# Altium PCB PCB.PcbDoc
Units mm, origin at the board's own origin, x right, y up, seen from the top; angles counter-clockwise.
Board outline 32 x 34 mm, 2 copper layers (Top Layer, Bottom Layer); 35 components, 21 nets, 187 pads, 54 vias.
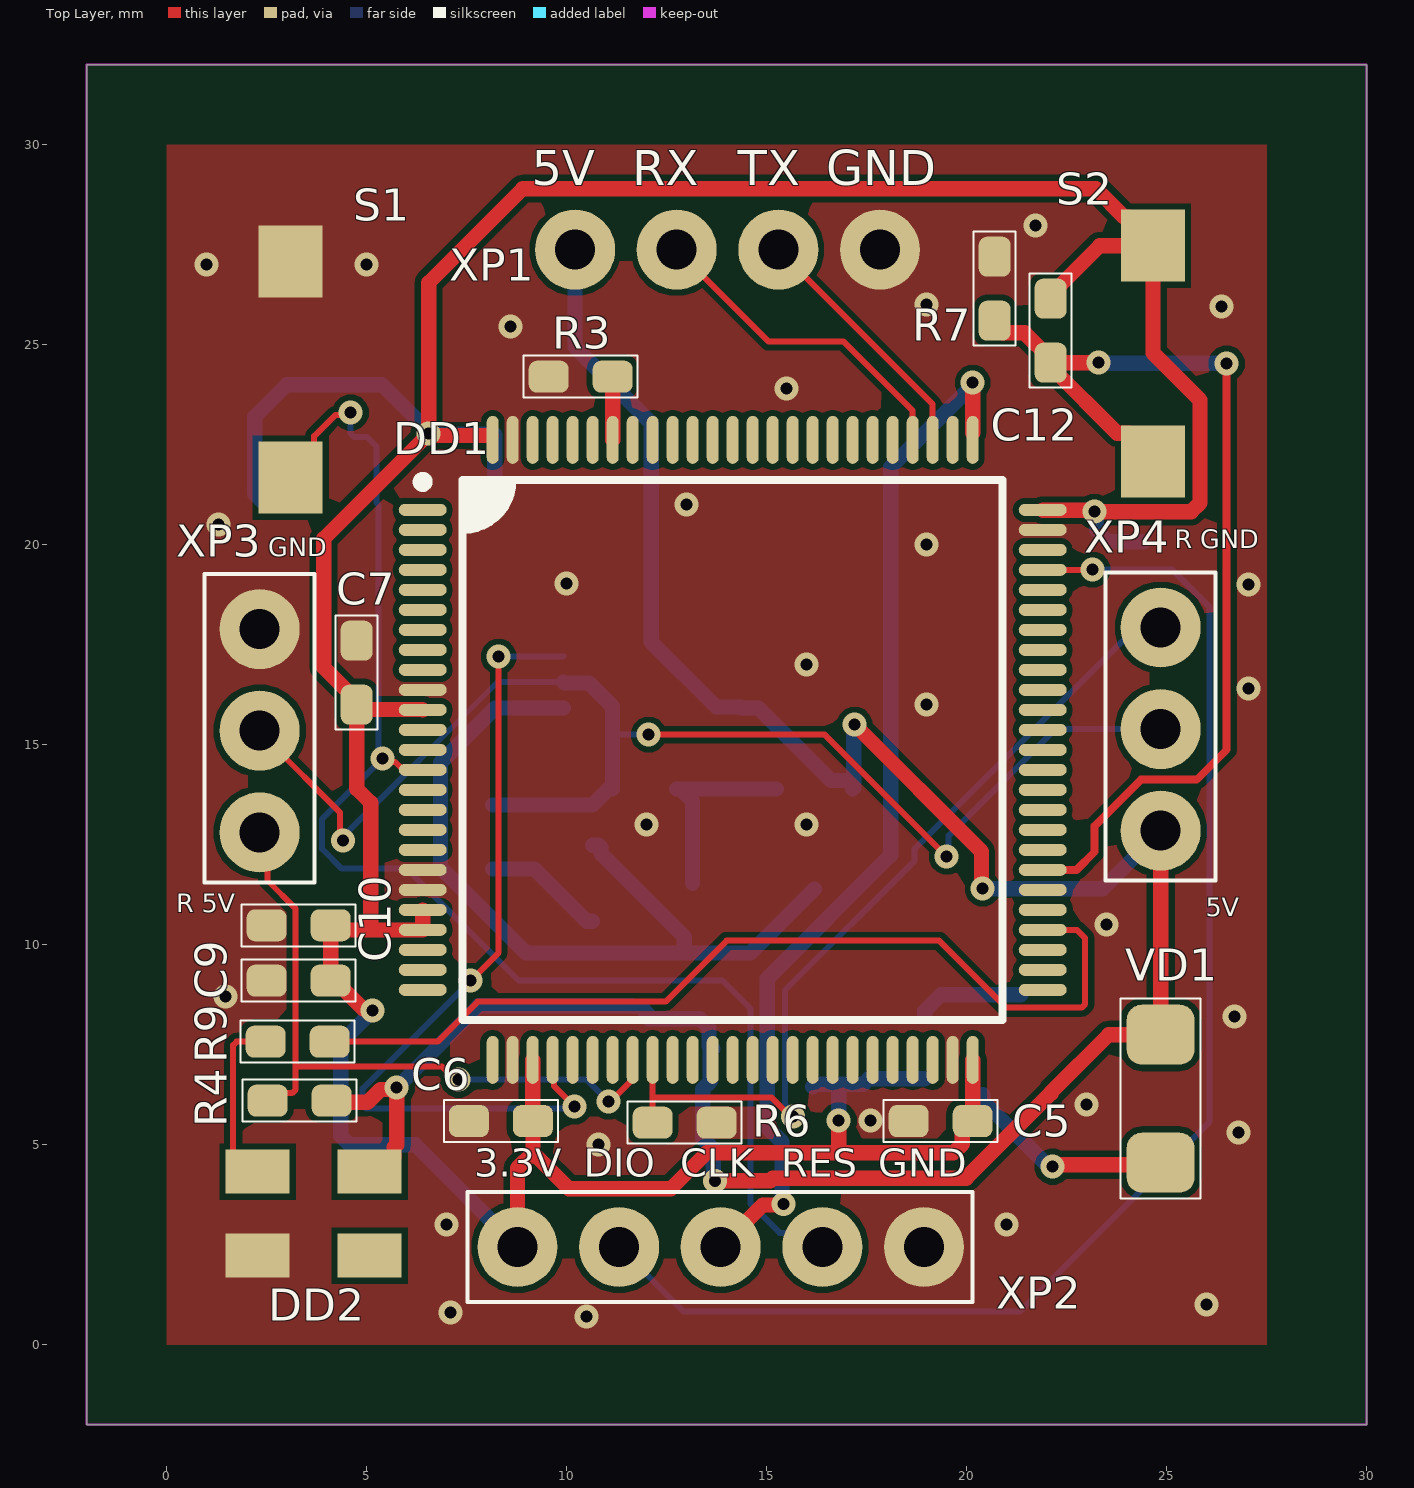
[diagram p0: Top Layer view]
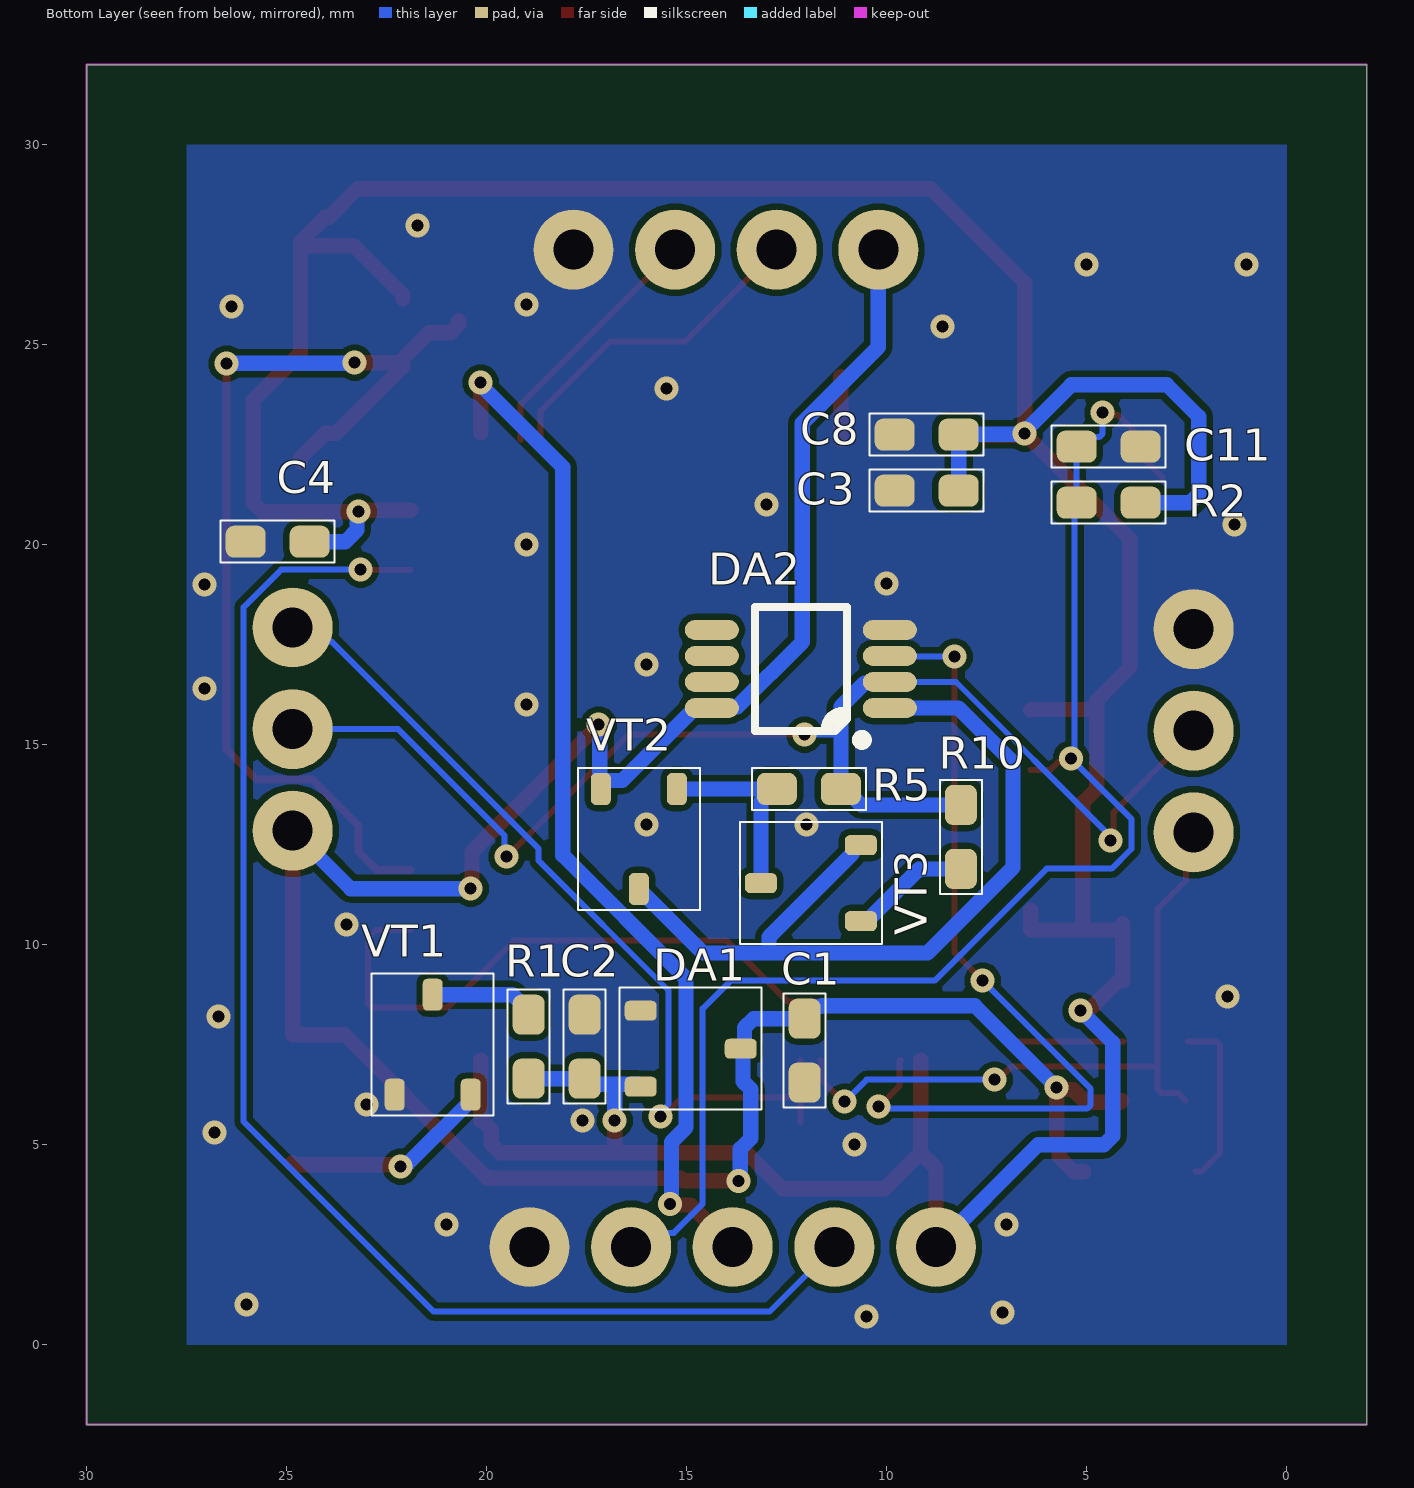
[diagram p1: Bottom Layer view, seen from below]
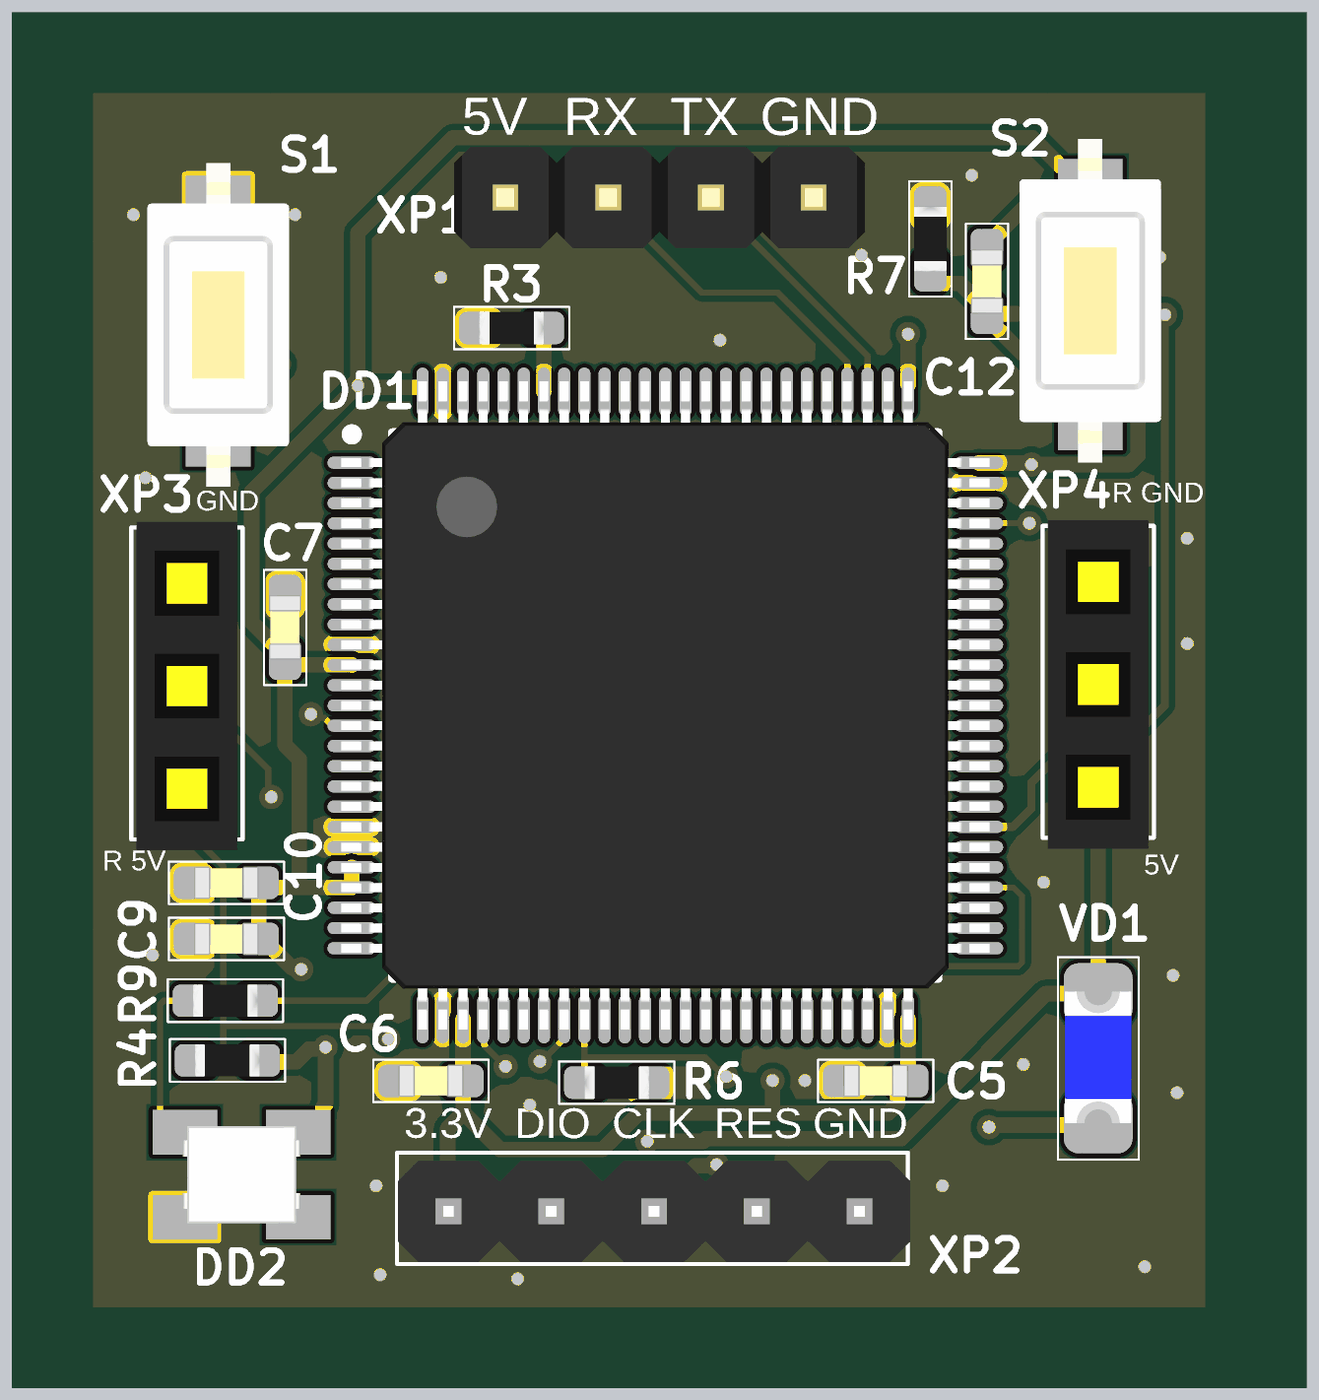
[diagram p2: 3D render of the assembled board from above, using the file's embedded part models]
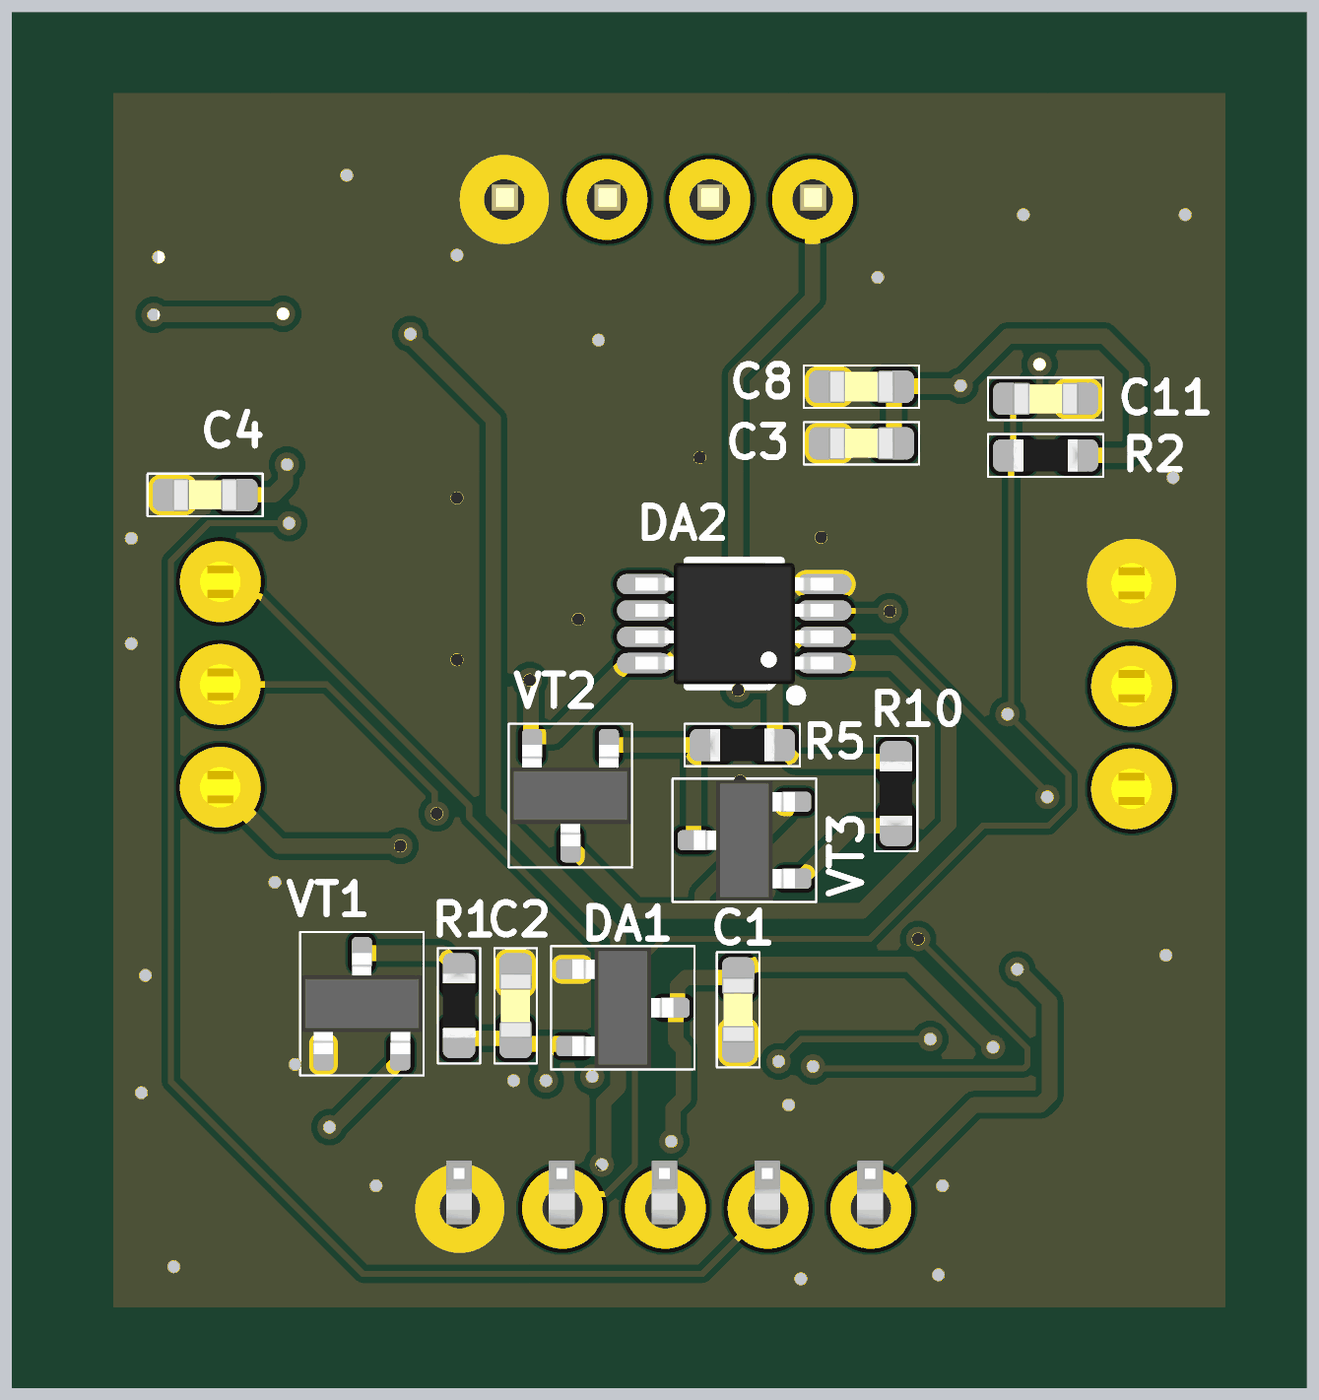
[diagram p3: 3D render of the assembled board from below, using the file's embedded part models]

## Layer stack, top to bottom
Top Solder: solder mask 0.0102, Solder Resist, Dk 3.5
Top Layer: signal copper 0.0356
Dielectric 1: dielectric 0.32, FR-4, Dk 4.8
Bottom Layer: signal copper 0.0356
Bottom Solder: solder mask 0.0102, Solder Resist, Dk 3.5

## Board outline
-2,-2 30,-2 30,32 -2,32

## Design rules (kind name [scope] priority, off if disabled: settings)
Clearance [All] p1: gap=0.15 ignorepadtopadclearanceinfootprint=FALSE
PlaneConnect [All] p1: planeconnectstyle=Direct reliefexpansion=0.508 reliefentries=4 reliefconductorwidth=0.254 reliefairgap=0.254
PolygonConnect [All] p1: connectstyle=Direct reliefconductorwidth=0.254 reliefentries=2 polygonreliefangle="45 Angle" airgapwidth=0.254
RoutingVias [All] p1: holewidth=0.3 width=0.6 viastyle="Through Hole" minholewidth=0.3 minwidth=0.6 maxholewidth=0.3 maxwidth=0.6
SolderMaskExpansion [All] p1: expansion=0.102 istentingtop=FALSE
Width PWR_width [InNetClass('PWR')] p1: maxlimit=0.5 minlimit=0.15 preferedwidth=0.5
Width [All] p2: maxlimit=0.5 minlimit=0.15 preferedwidth=0.15
29 further rules are at their usual default settings.

## Components (designator, comment, footprint, x,y, rotation, side; value= is the part's Value field where it differs from the comment)
C1 "SetValue!" C_SMD_0603 12.05,6.55 r90 bottom
C2 "SetValue!" C_SMD_0603 17.55,8.25 r270 bottom
C3 "100n" C_SMD_0603 9.8,21.35 r180 bottom
C4 "100n" C_SMD_0603 26.025,20.075 r180 bottom
C5 "100n" C_SMD_0603 18.55,5.591 r0 top
C6 "100n" C_SMD_0603 7.556,5.591 r0 top
C7 "100n" C_SMD_0603 4.75,17.6 r270 top
C8 "4.7u" C_SMD_0603 9.8,22.75 r180 bottom
C9 "10n" C_SMD_0603 2.5,9.1 r0 top
C10 "1u" C_SMD_0603 2.5,10.486 r0 top
C11 "SetValue!" C_SMD_0603 3.65,22.45 r0 bottom
C12 "SetValue!" C_SMD_0603 22.1,24.55 r90 top
DA1 "STU_5.5-3.3_NCP114ASN330T1G_SMD_TSOP-5" SOT23-3 16.15,8.35 r180 bottom
DA2 "OA_MC1458_THT_DIP-8" SOP-8 12.146,16.894 r0 bottom
DD1 "STM32F103C8T6" "ST LQFP-100 14x14MM" 14.15,14.871 r0 top
DD2 "Обозначение при заказе" NeoPixel 3.675,3.275 r0 top
R1 "SetValue!" R_SMD_0603 18.95,6.65 r90 bottom
R2 "SetValue!" R_SMD_0603 5.25,21.05 r180 bottom
R3 "SetValue!" R_SMD_0603 9.55,24.2 r0 top
R4 "SetValue!" R_SMD_0603 2.525,6.1 r0 top
R5 "SetValue!" R_SMD_0603 11.146,13.894 r0 bottom
R6 "SetValue!" R_SMD_0603 13.75,5.55 r180 top
R7 "SetValue!" R_SMD_0603 20.7,25.6 r90 top
R9 "SetValue!" R_SMD_0603 2.475,7.575 r0 top
R10 "SetValue!" R_SMD_0603 8.146,13.494 r270 bottom
S1 "BUT_SMD_KLS7-TS3608-5.0-180" BUT_SMD 3.1,27.075 r270 top
S2 "BUT_SMD_KLS7-TS3608-5.0-180" BUT_SMD 24.654,22.075 r90 top
VD1 "LED_SMD_BLUE" LED_SMD_BLUE 24.85,7.75 r270 top
VT1 "Обозначение при заказе" SOT23-3 22.3,6.25 r90 bottom
VT2 "Обозначение при заказе" SOT23-3 15.246,13.894 r270 bottom
VT3 "Обозначение при заказе" SOT23-3 10.646,10.59 r0 bottom
XP1 "XS_4PINS_PINS_Left" UART 10.21,27.375 r0 top
XP2 "XS_5PINS_PINS_Left" ST-LINK 8.77,2.444 r0 top
XP3 "Обозначение при заказе" 3PINS -0.575,15.87 r90 top
XP4 "Обозначение при заказе" 3PINS 21.95,15.91 r90 top

## Footprints (in the part's own frame and the unit in brackets; to place one, negate y for a bottom-side part, rotate by r counter-clockwise, add the part's x,y. Pads: shape width x height; smd on the part's side, far side on the other; paste and mask are expansions set on the pad)
3PINS [mm]
  round 2 hole 1: 1(-3.06,-2.9) 2(-0.52,-2.9) 3(2.02,-2.9)
  silkscreen extent -4.31,-4.28 3.4,-1.52, body extent -4.58,-4.15 3.54,-1.65, height 5
BUT_SMD [mm]
  rect 1.8x1.6 smd: 1(0,0) 2(5.4,0)
  body extent -1.2,-1.75 6.8,1.75, height 2.5
C_SMD_0603 [mm]
  rrect50% 1x0.8 smd: 1(0,0) 2(1.6,0)
  silkscreen extent -0.63,-0.53 2.22,0.53, body extent 0,-0.4 1.6,0.4, height 0.8
LED_SMD_BLUE [mm]
  rrect50% 1.5x1.7 smd: 1(0,0) 2(3.2,0)
  silkscreen extent -0.9,-1 4.1,1, body extent -0.06,-0.82 3.21,0.82, height 0.9
NeoPixel [mm]
  rect 1.6x1.1 smd: 1(-1.4,-1.05) 2(-1.4,1.05) 3(1.4,1.05) 4(1.4,-1.05)
  body extent -1.45,-1.2 1.45,1.2, height 1.1
R_SMD_0603 [mm]
  rrect50% 1x0.8 smd: 1(0,0) 2(1.6,0)
  silkscreen extent -0.63,-0.53 2.22,0.53, body extent 0,-0.4 1.6,0.4, height 0.45
SOP-8 [mm] "TSOP, 8-Leads, Body 3.00x3.00mm, Pitch 0.65mm, IPC Medium Density"
  oval 1.35x0.5 smd: 1(-2.225,0.975) 2(-2.225,0.325) 3(-2.225,-0.325) 4(-2.225,-0.975) 5(2.225,-0.975) 6(2.225,-0.325) 7(2.225,0.325) 8(2.225,0.975)
  silkscreen extent -1.65,-1.55 1.15,1.9, body extent -2.45,-1.5 2.45,1.5, height 1.1
SOT23-3 [mm]
  rrect50% 0.8x0.5 smd: 1(0,0) 2(0,-1.9) 3(2.5,-0.95)
  silkscreen extent -0.53,-2.47 3.03,0.58, body extent 0,-2.45 2.5,0.55, height 1.1
"ST LQFP-100 14x14MM" [mm] "Thin QFP, 100-Leads, Body 14x14mm, Pitch 0.5mm, ST Recommended"
  oval 1.2x0.3 smd: 1(-7.75,6) 2(-7.75,5.5) 3(-7.75,5) 4(-7.75,4.5) 5(-7.75,4) 6(-7.75,3.5) 7(-7.75,3) 8(-7.75,2.5) 9(-7.75,2) 10(-7.75,1.5) 11(-7.75,1) 12(-7.75,0.5) 13(-7.75,0) 14(-7.75,-0.5) 15(-7.75,-1) 16(-7.75,-1.5) 17(-7.75,-2) 18(-7.75,-2.5) 19(-7.75,-3) 20(-7.75,-3.5) 21(-7.75,-4) 22(-7.75,-4.5) 23(-7.75,-5) 24(-7.75,-5.5) 25(-7.75,-6) 51(7.75,-6) 52(7.75,-5.5) 53(7.75,-5) 54(7.75,-4.5) 55(7.75,-4) 56(7.75,-3.5) 57(7.75,-3) 58(7.75,-2.5) 59(7.75,-2) 60(7.75,-1.5) 61(7.75,-1) 62(7.75,-0.5) 63(7.75,0) 64(7.75,0.5) 65(7.75,1) 66(7.75,1.5) 67(7.75,2) 68(7.75,2.5) 69(7.75,3) 70(7.75,3.5) 71(7.75,4) 72(7.75,4.5) 73(7.75,5) 74(7.75,5.5) 75(7.75,6)
  oval 0.3x1.2 smd: 26(-6,-7.75) 27(-5.5,-7.75) 28(-5,-7.75) 29(-4.5,-7.75) 30(-4,-7.75) 31(-3.5,-7.75) 32(-3,-7.75) 33(-2.5,-7.75) 34(-2,-7.75) 35(-1.5,-7.75) 36(-1,-7.75) 37(-0.5,-7.75) 38(0,-7.75) 39(0.5,-7.75) 40(1,-7.75) 41(1.5,-7.75) 42(2,-7.75) 43(2.5,-7.75) 44(3,-7.75) 45(3.5,-7.75) 46(4,-7.75) 47(4.5,-7.75) 48(5,-7.75) 49(5.5,-7.75) 50(6,-7.75) 76(6,7.75) 77(5.5,7.75) 78(5,7.75) 79(4.5,7.75) 80(4,7.75) 81(3.5,7.75) 82(3,7.75) 83(2.5,7.75) 84(2,7.75) 85(1.5,7.75) 86(1,7.75) 87(0.5,7.75) 88(0,7.75) 89(-0.5,7.75) 90(-1,7.75) 91(-1.5,7.75) 92(-2,7.75) 93(-2.5,7.75) 94(-3,7.75) 95(-3.5,7.75) 96(-4,7.75) 97(-4.5,7.75) 98(-5,7.75) 99(-5.5,7.75) 100(-6,7.75)
  silkscreen extent -7.87,-6.75 6.75,6.82, body extent -8.01,-8.01 8.01,8.01, height 1.63
ST-LINK [mm]
  round 2 hole 1: 1(0,0) 2(2.54,0) 3(5.08,0) 4(7.62,0) 5(10.16,0)
  silkscreen extent -1.25,-1.38 11.37,1.38, body extent -1.23,-1.33 11.43,1.17, height 8.61
UART [mm]
  round 2 hole 1: 1(0,0) 2(2.54,0) 3(5.08,0) 4(7.62,0)
  body extent -1.28,-1.2 8.88,1.3, height 10.54

## Part data
C1 C2 C3 C4 C5 C6 C7 C8 C9 C10 C11 C12: library part C_Ceramic_SMD_0603
DD1: library part STM32_F103c8t6_LQFP48
DD2: library part NeoPixel, "Описание свойств компонента"
R1 R2 R3 R4 R5 R6 R7 R9 R10: library part R_SMD_0603
VT1 VT2 VT3: library part npn
XP3 XP4: library part XS_3pins, "Описание свойств компонента"

## Via types
v1: diameter 0.6, hole 0.3, Top Layer to Bottom Layer, tented both sides, 54 vias

## Nets (pads, with @x,y where several pads share a name; then routed paths per layer and width w, separated by ;. In a path a pad name is that pad's centre, name@x,y a point inside that pad or via, vN(x,y) a via of type N, cw(c..) or ccw(c..) an arc to the next point about the centre after c; other vN are vias at no path point)
3.3V: C2.2 C3.2 C4.2 C5.2 C6.2 C7.2 C8.2 C9.2 C10.2 C12.2 DA1.2 DD1.11 DD1.21 DD1.22 DD1.28 DD1.50 DD1.75 DD1.100 R1.1 R2.2 S2.2 XP2.1 | length 105.9
  Top Layer w0.381: C10.2@4.1,10.371 C9.2 4.205,9.1 4.913,8.392 5.108,8.392 v1(5.15,8.35) ; C10.2@4.1,10.525 4.254,10.371 5.1,10.371 ; DD1.21 DD1.22 5.1,10.371 ; DD1.11 6.391,15.88 4.87,15.88 C7.2 ; DD1.100@8.11,22.733 6.592,22.733 v1(6.55,22.775) ; XP2.1 8.77,4.414 9.156,4.8 ; C6.2@9.15,5.75 DD1.28 ; C6.2 9.156,4.8 ; v1(16.8,5.6) 16.8,4.8 ; C5.2 20.098,5.591 19.889,5.383 19.889,5.023 19.666,4.8 16.8,4.8 ; C5.2@20.15,5.75 DD1.50 ; DD1.75 21.91,20.861 23.164,20.861 v1(23.2,20.825) 25.611,20.825 25.835,21.048 25.835,23.616 24.654,24.796 S2.2 ; C12.2 22.1,26.25 23.325,27.475 S2.2 ; C7.2 4.75,13.9 5.1,13.55 5.1,10.371 ; C7.2 4.75,16.105 3.925,16.93 3.925,20.15 v1(6.55,22.775) ; v1(6.55,22.775) 6.55,26.55 8.9,28.9 23.229,28.9 23.945,28.185 24.045,28.185 24.654,27.575 S2.2 ; 9.156,4.8 10.056,3.9 12.6,3.9 13.5,4.8 16.8,4.8
  Bottom Layer w0.381: R2.2 2.423,21.05 2.2,21.273 2.2,23.2 3,24 5.384,24 6.55,22.834 v1(6.55,22.775) 6.562,22.762 8.188,22.762 C8.2 C3.2 ; v1(5.15,8.35) 4.35,7.55 4.35,5.223 4.573,5 6.214,5 XP2.1 ; DA1.2 16.21,6.509 16.81,6.509 ; v1@16.842,5.642 v1(16.8,5.6) 16.8,6.5 16.81,6.509 ; R1.1 C2.2 17.41,6.509 16.81,6.509 ; v1(23.2,20.825) 23.242,20.783 23.242,20.367 23.534,20.075 C4.2
5V: C1.2 DA1.3 DA2.8 DD2.3 R4.2 VD1.1 VT2.2 XP1.1 XP4.1 | length 64.4
  Top Layer w0.381: R4.2 4.164,6.061 5.022,6.061 5.345,6.383 5.708,6.383 v1(5.75,6.425) ; DD2.3 5.325,4.325 5.684,4.685 5.684,4.935 5.75,5 v1@5.75,6.35 ; v1(13.703,4.097) 15.087,4.097 15.154,4.164 19.987,4.164 22.112,6.289 22.112,6.312 23.55,7.75 VD1.1 XP4.1 ; v1(17.2,15.5) 20.369,12.331 20.369,11.431 v1(20.4,11.4)
  Bottom Layer w0.381: v1(5.75,6.425) 7.8,8.475 11.617,8.475 11.639,8.454 11.841,8.454 12.05,8.245 C1.2 13.331,8.15 13.554,7.927 13.554,7.459 DA1.3@13.613,7.4 ; XP1.1 10.21,24.94 12.111,23.039 12.111,17.569 13.738,15.942 14.348,15.942 DA2.8 14.796,15.919 16.612,14.103 17.087,14.103 17.146,14.044 VT2.2 17.173,13.921 17.173,15.473 v1(17.2,15.5) ; DA1.3 13.591,7.341 13.591,6.578 13.4,6.388 13.4,5.159 13.661,4.898 13.661,4.139 v1(13.703,4.097) ; v1(20.4,11.4) 23.4,11.4 XP4.1
Base: DA2.2 R5.1 R10.1 XP3.2 XP4.2 | length 34.1
  Top Layer w0.15: XP3.2@2.521,15.394 2.521,15.117 4.334,13.303 4.334,12.685 v1(4.41,12.61) ; v1(12.05,15.25) 16.45,15.25 v1(19.5,12.2)
  Bottom Layer w0.15: v1(4.41,12.61) 4.41,12.71 8.269,16.569 DA2.2 ; 11.146,15.375 11.271,15.25 v1(12.05,15.25) ; v1(19.5,12.2) 19.55,12.25 19.55,12.725 22.215,15.39 XP4.2
  Bottom Layer w0.381: R10.1 10.641,13.494 11.041,13.894 R5.1 11.146,15.375 11.146,15.954 10.554,16.546 9.944,16.546 DA2.2
GND: C1.1 C2.1 C3.1 C4.1 C5.1 C6.1 C7.1 C8.1 C9.1 C10.1 C11.1 DA1.1 DA2.4 DD1.10 DD1.19 DD1.20 DD1.27 DD1.49 DD1.74 DD1.99 DD2.1 R3.1 R6.1 R7.2 S1.1 VT1.1 XP1.4 XP2.5 XP3.3
  other v1: 10.5,0.7 7.1,0.8 26,1 7,3 21,3 10.8,5 26.8,5.3 17.6,5.6 23,6 26.7,8.2 1.475,8.7 23.5,10.5 12,13 16,13 19,16 27.05,16.4 16,17 27.05,19 10,19.025 19,20 1.3,20.5 13,21 15.5,23.9 8.6,25.45 26.375,25.95 19,26 1,27 5,27 21.725,27.975
NetC11_2: C11.2 DD1.14 R2.1 S1.2 XP2.4 | length 35.1
  Top Layer w0.15: S1.2 3.687,22.262 3.687,22.712 4.216,23.241 4.541,23.241 v1(4.6,23.3) ; v1(5.39,14.654) 5.477,14.568 5.712,14.568 5.909,14.371 DD1.14
  Bottom Layer w0.15: v1(4.6,23.3) 4.6,22.777 4.688,22.689 5.011,22.689 C11.2 R2.1 5.3,21 5.3,14.85 5.39,14.76 v1(5.39,14.654) 3.885,13.148 3.885,12.392 4.377,11.9 6,11.9 8.8,9.1 13.9,9.1 14.6,8.4 14.6,3.522 15.324,2.798 16.036,2.798 XP2.4
NetC12_1: C12.1 DD1.57 R7.1 S2.1 | length 25.9
  Top Layer w0.15: C12.1@22.1,24.45 C12.1
  Top Layer w0.2: DD1.57 22.746,11.871 23.2,12.325 23.2,12.968 24.357,14.125 25.75,14.125 26.5,14.875 v1(26.5,24.525)
  Top Layer w0.381: R7.1 20.7,25.505 20.909,25.296 21.448,25.296 22.1,24.645 C12.1 v1(23.3,24.55) ; C12.1@22.1,24.45 23.765,22.785 24.045,22.785 24.654,22.175 S2.1
  Bottom Layer w0.381: v1(23.3,24.55) 23.312,24.537 26.488,24.537 v1(26.5,24.525)
NetDA2_1: DA2.1 VT2.3 VT3.2 | length 20.9
  Bottom Layer w0.381: DA2.1 8.206,15.919 6.846,14.558 6.846,11.929 8.982,9.794 12.855,9.794 ; VT3.2 10.796,12.49 10.856,12.43 10.856,12.28 12.94,10.195 12.94,9.88 12.855,9.794 ; VT2.3 14.596,9.794 12.855,9.794
NetDA2_3: DA2.3 DD1.29 | length 21
  Top Layer w0.15: v1(7.6,9.1) 8.3,9.8 v1(8.3,17.2) ; DD1.29 9.679,7.092 9.679,6.471 v1(10.2,5.95)
  Bottom Layer w0.15: v1(7.6,9.1) 4.9,6.4 4.9,5.988 4.988,5.9 10.15,5.9 v1(10.2,5.95) ; v1(8.3,17.2) 8.309,17.209 9.912,17.209 DA2.3
NetDD1_33: DD1.33 R4.1 XP3.1 | length 17.1
  Top Layer w0.15: XP3.1@2.521,12.854 2.521,11.605 3.225,10.901 3.225,6.95 ; R4.1 2.714,6.289 3.137,6.289 3.225,6.377 3.225,6.95 ; v1(7.3,6.625) 7.208,6.625 6.883,6.95 3.225,6.95 ; v1(11.05,6.075) 11.085,6.075 11.65,6.64 DD1.33
  Bottom Layer w0.15: v1(7.3,6.625) 10.5,6.625 v1(11.05,6.075)
NetDD1_34: DD1.34 R6.2 XP4.3 | length 21.8
  Top Layer w0.15: R6.2 12.15,6.175 ; DD1.34 12.15,6.175 ; v1(15.656,5.7) 15.6,5.7 15.125,6.175 12.15,6.175
  Bottom Layer w0.15: v1(15.656,5.7) 15.656,5.812 15.455,6.013 15.455,8.855 18.7,12.1 18.7,12.4 23.876,17.576 24.496,17.576 XP4.3
NetDD1_54: DD1.54 R9.2 | length 23.5
  Top Layer w0.15: R9.2 6.775,7.575 7.775,8.575 12.475,8.575 14,10.1 19.313,10.1 20.988,8.425 22.875,8.425 22.963,8.513 22.963,10.162 22.754,10.371 DD1.54
NetDD1_72: DD1.72 XP2.2 | length 34.8
  Top Layer w0.15: DD1.72 21.902,19.373 23.148,19.373 v1(23.15,19.375)
  Bottom Layer w0.15: XP2.2 12.929,0.825 21.325,0.825 26.075,5.575 26.075,18.437 25.137,19.375 v1(23.15,19.375)
NetDD1_76: DD1.76 XP2.3 | length 26.1
  Top Layer w0.381: XP2.3 14.901,3.495 15.391,3.495 v1(15.419,3.523) ; DD1.76@20.15,22.8 v1(20.15,24.05)
  Bottom Layer w0.381: v1(15.419,3.523) 15.38,3.562 15.38,5.07 15.015,5.435 15.015,9.155 18.1,12.239 18.1,21.941 20.15,23.991 v1(20.15,24.05)
NetDD1_94: DD1.94 R3.2 | length 1.6
  Top Layer w0.381: DD1.94 R3.2
NetDD2_2: DD2.2 R9.1 | length 4.3
  Top Layer w0.15: DD2.2 2.137,4.325 1.662,4.8 1.662,7.487 1.75,7.575 R9.1
NetR1_2: R1.2 VT1.3 | length 2.7
  Bottom Layer w0.381: R1.2 18.95,8.345 19.355,8.75 VT1.3
NetR5_2: R5.2 VT2.1 VT3.3 | length 5
  Bottom Layer w0.381: R5.2 R5.2@12.841,13.894 ; VT3.3 13.146,13.589 R5.2@12.841,13.894 ; VT2.1 R5.2@12.841,13.894
NetR10_2: R10.2 VT3.1 | length 3
  Bottom Layer w0.381: R10.2 9.192,11.894 10.496,10.59 VT3.1
NetVD1_2: VD1.2 VT1.2 | length 5.3
  Top Layer w0.381: v1(22.15,4.45) 22.2,4.5 24.8,4.5 VD1.2
  Bottom Layer w0.381: VT1.2 20.4,6.1 21.987,4.513 22.087,4.513 v1(22.15,4.45)
RX: DD1.79 XP1.2 | length 8.3
  Top Layer w0.15: XP1.2 15.047,25.078 16.922,25.078 18.65,23.35 DD1.79
TX: DD1.78 XP1.3 | length 6.4
  Top Layer w0.15: XP1.3 19.15,23.515 DD1.78
pads on no net: DA2.5 DA2.6 DA2.7 DD1.1 DD1.2 DD1.3 DD1.4 DD1.5 DD1.6 DD1.7 DD1.8 DD1.9 DD1.12 DD1.13 DD1.15 DD1.16 DD1.17 DD1.18 DD1.23 DD1.24 DD1.25 DD1.26 DD1.30 DD1.31 DD1.32 DD1.35 DD1.36 DD1.37 DD1.38 DD1.39 DD1.40 DD1.41 DD1.42 DD1.43 DD1.44 DD1.45 DD1.46 DD1.47 DD1.48 DD1.51 DD1.52 DD1.53 DD1.55 DD1.56 DD1.58 DD1.59 DD1.60 DD1.61 DD1.62 DD1.63 DD1.64 DD1.65 DD1.66 DD1.67 DD1.68 DD1.69 DD1.70 DD1.71 DD1.73 DD1.77 DD1.80 DD1.81 DD1.82 DD1.83 DD1.84 DD1.85 DD1.86 DD1.87 DD1.88 DD1.89 DD1.90 DD1.91 DD1.92 DD1.93 DD1.95 DD1.96 DD1.97 DD1.98 DD2.4

## Polygon pours and split planes (outlines as drawn)
GND on Top Layer "GND_L01_P000" (solid, remove dead copper, pour order 0): 0,0 0,30 27.5,30 27.5,0
GND on Bottom Layer "GND_L02_P002" (solid, remove dead copper, pour order 2): 0,0 0,30 27.5,30 27.5,0

## Keep-outs
Top Layer:
  lines w0.05: -2,-2 -2,32
Keep-Out Layer:
  lines w0.05: -2,-2 30,-2 30,32 -2,32

## Silkscreen, mask and mechanical layers (free items; w line width, h text height)
Top Overlay:
  text "R GND" at 25.196,19.744 h0.8
  text "GND" at 2.544,19.544 h0.8
  text "R 5V" at 0.236,10.649 h0.8
  text "5V" at 25.981,10.549 h0.8

## Text inside footprints (layer, text, board x,y; h text height)
XP1: Top Overlay "GND" at 16.491,28.695 h1.5; Top Overlay "TX" at 14.274,28.695 h1.5; Top Overlay "RX" at 11.636,28.695 h1.5; Top Overlay "5V" at 9.123,28.703 h1.5
XP2: Top Overlay "GND" at 17.794,3.96 h1.2; Top Overlay "RES" at 15.357,3.96 h1.2; Top Overlay "3.3V" at 7.693,3.965 h1.2; Top Overlay "CLK" at 12.834,3.96 h1.2; Top Overlay "DIO" at 10.421,3.96 h1.2